# EAGLE board RC_shield (EAGLE 7.1.0)
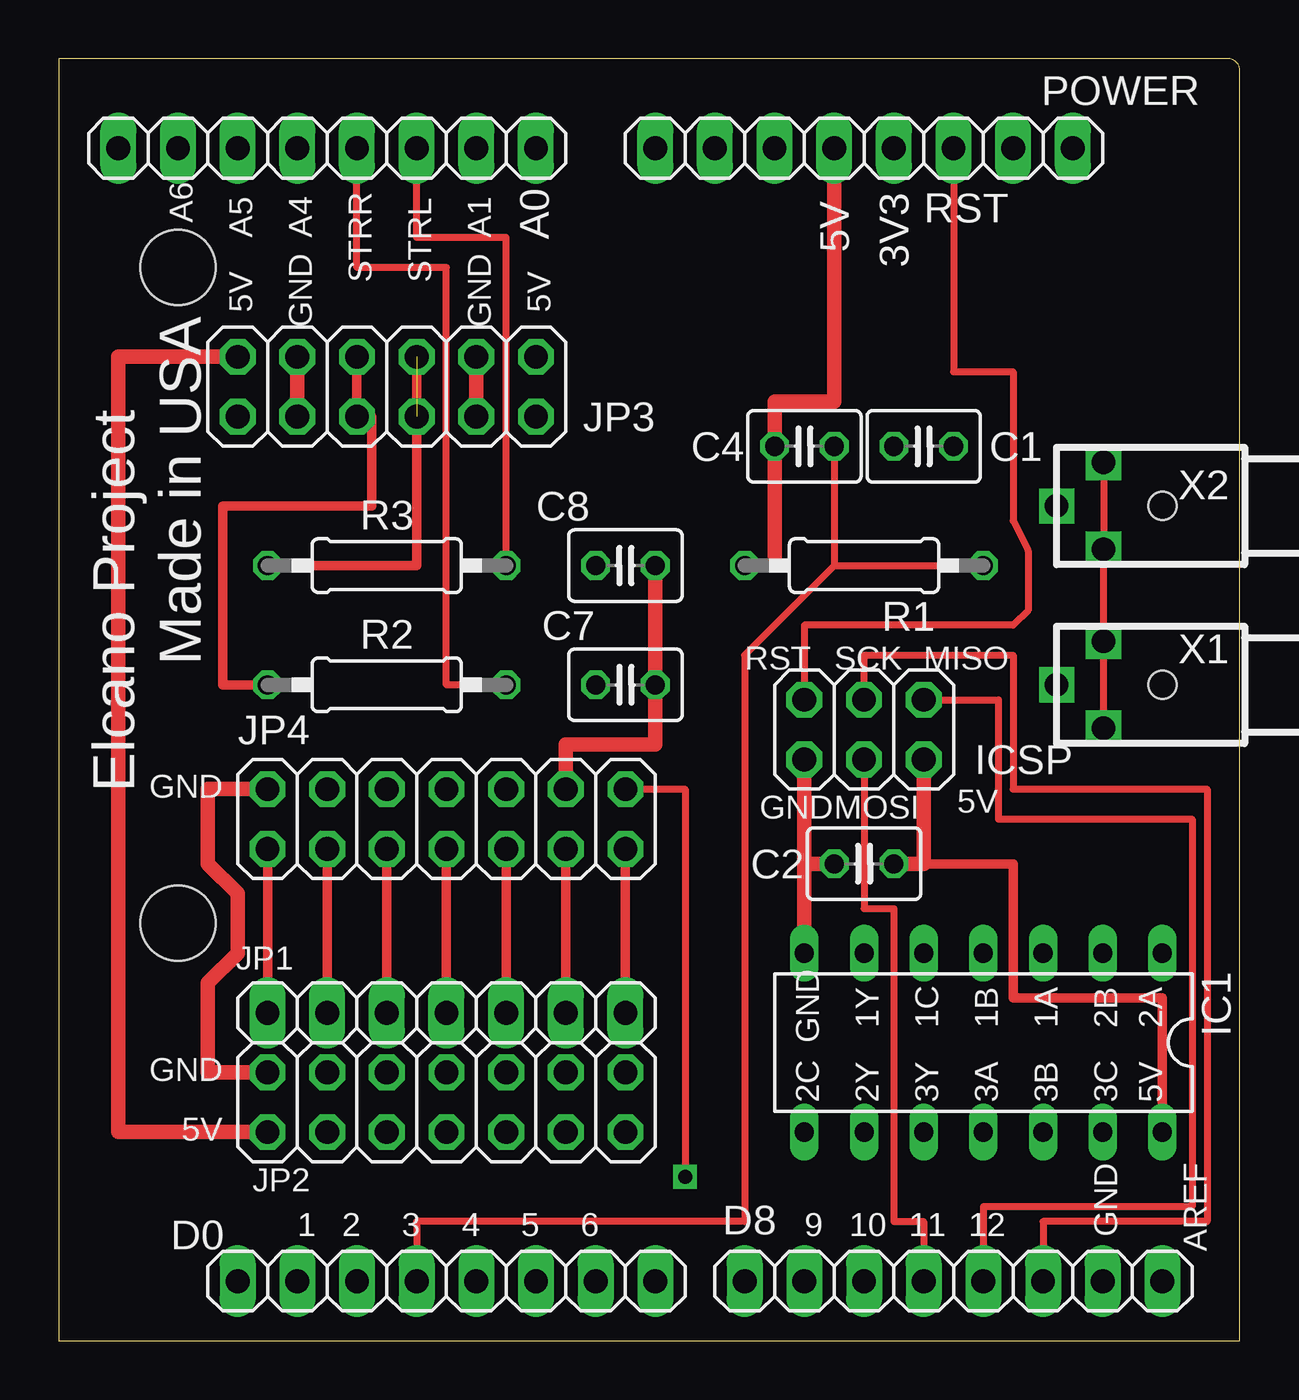
[diagram p0: board, top side]
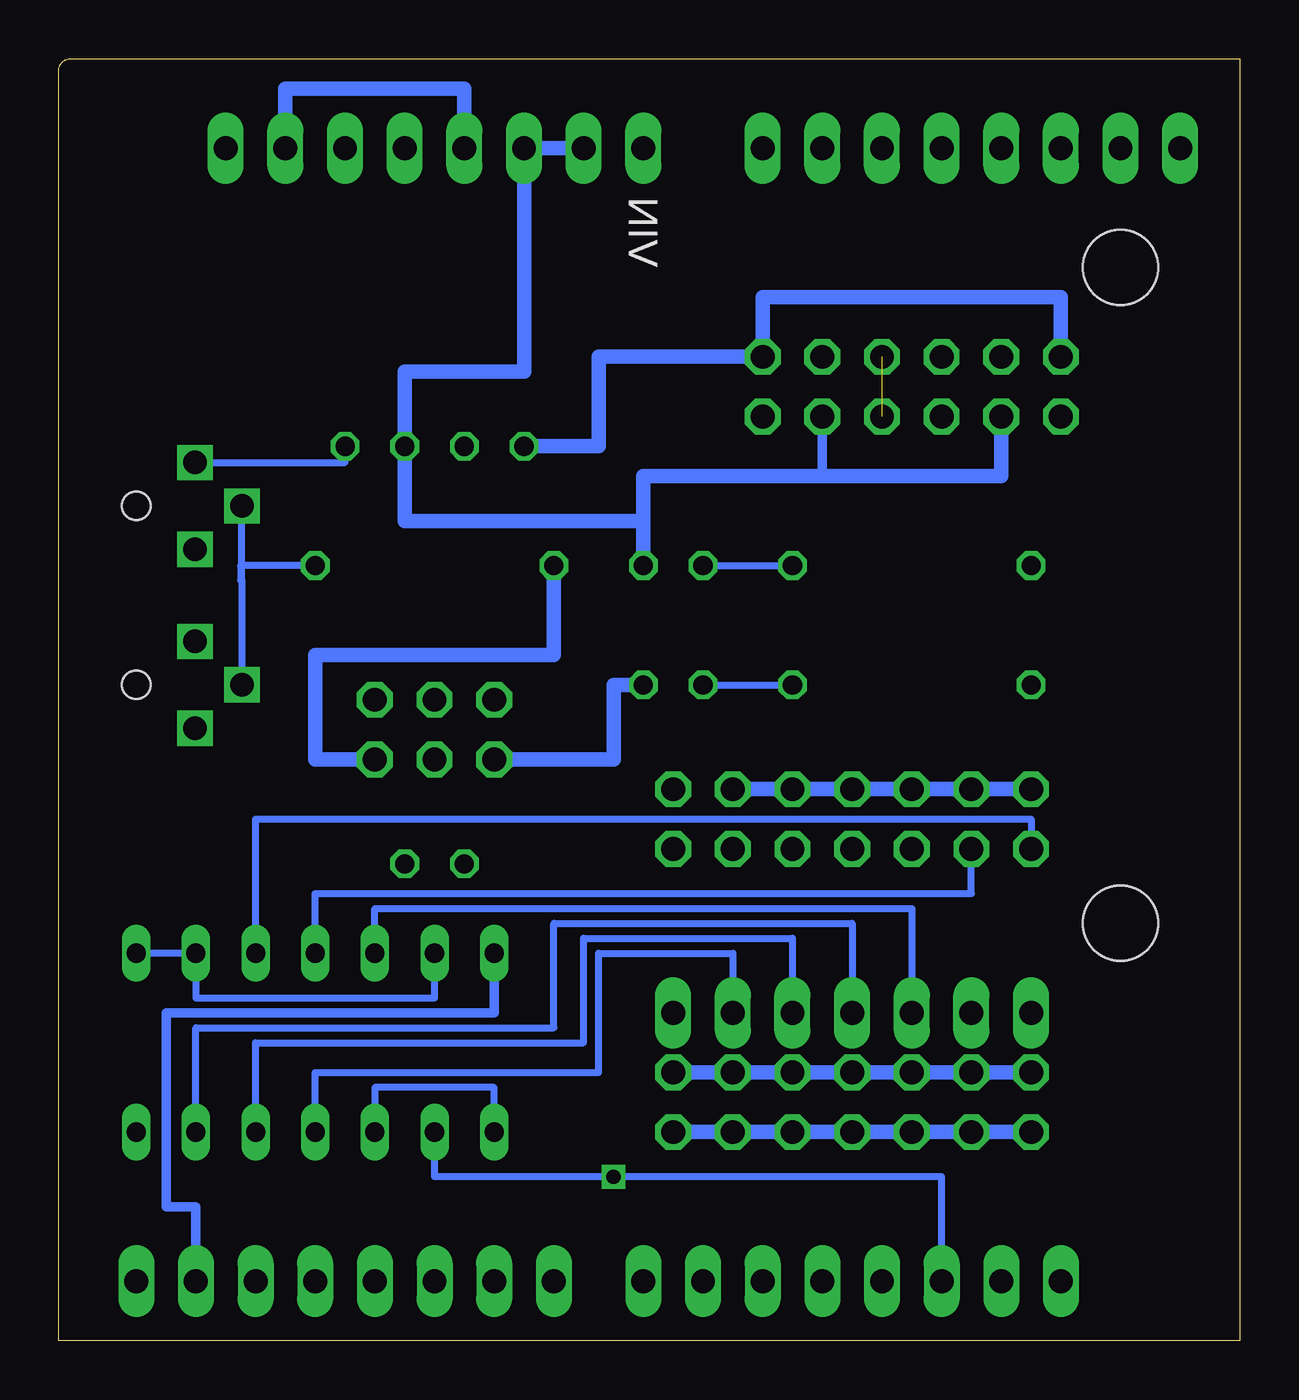
[diagram p1: board, bottom side, seen from below]

Size 50.29 x 54.61 mm. Coordinates in mm from the lower left corner, seen from the top.
Outline: 0,54.6 0,0 50.29,0 50.29,54.1 arc90 49.78,54.61 0,54.6
Copper layers (1*16): Top 0.0178mm / dielectric 59mil / Bottom 0.0178mm
Design rules "SSC-EAGLE-2Lyr_v1.0.0.3": minimum track width 6mil, minimum drill 14mil, track to track 6mil, track to pad 6mil, pad to pad 6mil, via to via 6mil, smd to smd 6mil, copper to edge 20mil, drill to drill 16mil, minimum pad ring 8mil, minimum via ring 8mil, stop-mask expansion 3mil, vias tented up to drill 0mil, thermal gap 10mil
Net classes: 0 default: width 0.152 mm, drill 0.305 mm, clearance 0.152 mm
Holes 3.2 mm at 5.08,17.78 5.08,45.72

## Footprints (pad centres in the part's own frame; a part is rotated, then mirrored left to right if it is on the bottom)
1X08 = drill 1.016 long: 1 -8.89,0; 2 -6.35,0; 3 -3.81,0; 4 -1.27,0; 5 1.27,0; 6 3.81,0; 7 6.35,0; 8 8.89,0
C025-030X050 = drill 0.813 octagon: 1 -1.27,0; 2 1.27,0
DIL14 = drill 0.813 long: 1 -7.62,-3.81; 2 -5.08,-3.81; 3 -2.54,-3.81; 4 0,-3.81; 5 2.54,-3.81; 6 5.08,-3.81; 7 7.62,-3.81; 8 7.62,3.81; 9 5.08,3.81; 10 2.54,3.81; 11 0,3.81; 12 -2.54,3.81; 13 -5.08,3.81; 14 -7.62,3.81
2X03 = drill 1.016 octagon: 1 -2.54,-1.27; 2 -2.54,1.27; 3 0,-1.27; 4 0,1.27; 5 2.54,-1.27; 6 2.54,1.27
1X07 = drill 1.016 long: 1 -7.62,0; 2 -5.08,0; 3 -2.54,0; 4 0,0; 5 2.54,0; 6 5.08,0; 7 7.62,0
2X07 = drill 1.016 octagon: 1 -7.62,-1.27; 2 -7.62,1.27; 3 -5.08,-1.27; 4 -5.08,1.27; 5 -2.54,-1.27; 6 -2.54,1.27; 7 0,-1.27; 8 0,1.27; 9 2.54,-1.27; 10 2.54,1.27; 11 5.08,-1.27; 12 5.08,1.27; 13 7.62,-1.27; 14 7.62,1.27
2X06 = drill 1.016 octagon: 1 -6.35,-1.27; 2 -6.35,1.27; 3 -3.81,-1.27; 4 -3.81,1.27; 5 -1.27,-1.27; 6 -1.27,1.27; 7 1.27,-1.27; 8 1.27,1.27; 9 3.81,-1.27; 10 3.81,1.27; 11 6.35,-1.27; 12 6.35,1.27
0207/10 = drill 0.813 octagon: 1 -5.08,0; 2 5.08,0
ODO_JACK = drill 1 square: P$1 4.5,0; P$2 2.5,1.85; P$3 2.5,-1.85 | hole 1.2: 0,0

## Placement (x,y rotation side)
A0  A7  [1X08]  11.43,50.8 0 top
C1  1 uF  [C025-030X050]  36.83,38.1 0 top
C2  0.1 uF  [C025-030X050]  34.29,20.32 0 top
C4  1 uF  [C025-030X050]  31.75,38.1 0 top
C7  1 uF  [C025-030X050]  24.13,27.94 0 top
C8  1 uF  [C025-030X050]  24.13,33.02 180 top
D0  D7  [1X08]  16.51,2.54 180 top
D8  D13  [1X08]  38.1,2.54 180 top
IC1  744075  [DIL14]  39.37,12.7 180 top
ICSP  1  [2X03]  34.29,26.04 180 top
JP1  RC RECEIVER  [1X07]  16.51,13.97 0 top
JP2  RC PWR  [2X07]  16.51,10.16 0 top
JP3  Turn  [2X06]  13.97,40.64 180 top
JP4  RC Signals  [2X07]  16.51,22.23 0 top
POWER  GND  [1X08]  34.29,50.8 0 top
R1  4.7 K  [0207/10]  34.29,33.02 180 top
R2  4.7 K  [0207/10]  13.97,27.94 0 top
R3  4.7 K  [0207/10]  13.97,33.02 0 top
X1  CLICK  [ODO_JACK]  46.99,27.94 180 top
X2  CLICK  [ODO_JACK]  46.99,35.56 180 top

## Library data of the parts
A0 D0 D8 ICSP JP1-JP4 POWER = pinhead
C1 C2 C4 C7 C8 R1-R3 = rcl
IC1 = ic-package
X1 X2 = Elcano

## Nets
1A: IC1.3 JP1.1 JP4.1
1B: IC1.4 JP1.2 JP4.3
1C: IC1.5 JP1.3 JP4.5
1Y: IC1.1 IC1.2 IC1.6
3A: IC1.11 JP1.6 JP4.11
3B: IC1.12 JP1.5 JP4.9
3C: IC1.13 JP1.4 JP4.7
3Y: IC1.8 IC1.10
+5V: C2.2 C4.1 IC1.14 ICSP.2 JP2.1 JP2.3 JP2.5 JP2.7 JP2.9 JP2.11 JP2.13 JP3.1 JP3.11 POWER.4 POWER.7 R1.2
CLICK2: C4.2 D0.5 R1.1 X1.P$1 X2.P$1
GND: C1.1 C2.1 C7.2 C8.1 D8.2 IC1.7 ICSP.6 JP2.2 JP2.4 JP2.6 JP2.8 JP2.10 JP2.12 JP2.14 JP3.3 JP3.4 JP3.9 JP3.10 JP4.2 JP4.4 JP4.6 JP4.8 JP4.10 JP4.12 POWER.2 POWER.3
MISO: D8.4 ICSP.1
MOSI: D8.5 ICSP.4
N$1: JP3.7 JP3.8 R2.1
N$2: JP3.5 JP3.6 R3.1
N$3: JP1.7 JP4.13
N$23: C1.2 X1.P$2 X1.P$3 X2.P$2 X2.P$3
RC_COMBINED: D0.6 IC1.9 JP4.14
RST: ICSP.5 POWER.6
SCK: D8.3 ICSP.3
STR_L: A0.6 C8.2 R3.2
STR_R: A0.5 C7.1 R2.2

## Tracks (layer width: path | path; a pad name or v marks a point on that pad's centre or on a via)
1A
  Top 0.406: JP4.1 JP1.1
  Bottom 0.305: IC1.3 41.91,22.23 8.89,22.23 JP4.1
1B
  Top 0.406: JP4.3 JP1.2
  Bottom 0.305: IC1.4 39.37,19.05 11.43,19.05 JP4.3
1C
  Top 0.406: JP4.5 JP1.3
  Bottom 0.305: IC1.5 36.83,18.41 13.97,18.41 JP1.3
1Y
  Bottom 0.305: IC1.1 IC1.2 44.45,14.61 34.29,14.61 IC1.6
3A
  Top 0.406: JP4.11 JP1.6
  Bottom 0.305: IC1.11 39.37,11.43 27.3,11.43 27.3,16.51 21.59,16.51 JP1.6
3B
  Top 0.406: JP4.9 JP1.5
  Bottom 0.305: IC1.12 41.91,12.7 27.94,12.7 27.94,17.14 19.05,17.14 JP1.5
3C
  Top 0.406: JP4.7 JP1.4
  Bottom 0.305: IC1.13 44.45,13.34 29.21,13.34 29.21,17.78 16.51,17.78 JP1.4
3Y
  Bottom 0.305: IC1.8 31.75,10.79 36.83,10.79 IC1.10
+5V
  Top 0.305: 30.48,33.02 R1.2
  Top 0.406: IC1.14 46.99,14.61 40.64,14.61 40.64,20.32 36.19,20.32
  Top 0.61: 30.48,33.02 C4.1 30.48,40.01 33.02,40.01 POWER.4 | ICSP.2 36.83,20.32 36.19,20.32 C2.2 | JP2.1 2.54,8.89 2.54,41.91 JP3.11
  Bottom 0.406: JP2.1 JP2.3 JP2.5 JP2.7 JP2.9 JP2.11 JP2.13
  Bottom 0.61: C4.1 27.3,38.1 27.3,41.91 JP3.1 20.32,44.45 7.62,44.45 JP3.11 | POWER.7 40.64,53.34 33.02,53.34 POWER.4 | ICSP.2 39.37,24.77 39.37,29.21 29.21,29.21 R1.2 | JP2.13 JP2.1
CLICK2
  Top 0.305: C4.2 33.02,33.02 | 33.02,33.02 R1.1 | 33.02,33.02 29.21,29.21 29.21,5.08 15.24,5.08 D0.5
  Bottom 0.305: R1.1 42.55,33.02 42.55,32.38 42.49,32.38 | 42.49,32.38 X2.P$1 | 42.49,32.38 X1.P$1
GND
  Top 0.61: JP3.9 JP3.10 | JP3.3 JP3.4 | C8.1 C7.2 25.4,25.4 21.59,25.4 JP4.12 | ICSP.6 31.75,20.32 | 31.75,20.32 IC1.7 | C2.1 31.75,20.32 | JP4.2 6.35,23.5 6.35,20.32 7.62,19.05 7.62,16.51 6.35,15.24 6.35,11.43 JP2.2
  Bottom 0.406: 17.78,36.83 JP3.4 | D8.2 44.45,5.71 45.72,5.71 45.72,13.97 31.75,13.97 IC1.7
  Bottom 0.61: JP2.2 JP2.4 JP2.6 JP2.8 JP2.10 JP2.12 JP2.14 | JP4.2 JP4.4 JP4.6 JP4.8 JP4.10 JP4.12 | JP3.10 10.16,36.83 17.78,36.83 25.4,36.83 C8.1 25.4,34.92 35.56,34.92 C1.1 35.56,41.27 30.48,41.27 POWER.3 POWER.2 | ICSP.6 26.67,24.77 26.67,27.94 C7.2
MISO
  Top 0.305: ICSP.1 40,27.3 40,22.23 48.26,22.23 48.26,5.71 39.37,5.71 D8.4
MOSI
  Top 0.305: ICSP.4 34.29,18.41 35.56,18.41 35.56,5.08 36.83,5.08 D8.5
N$1
  Top 0.406: R2.1 6.98,27.94 6.98,35.56 13.34,35.56 13.34,39.37 JP3.8 JP3.7
N$2  (1 unrouted)
  Top 0.406: R3.1 15.24,33.02 JP3.5
N$3
  Top 0.406: JP4.13 JP1.7
N$23
  Top 0.305: X2.P$3 X2.P$2 X1.P$3 X1.P$2
  Bottom 0.305: X2.P$3 38.1,37.41 C1.2
RC_COMBINED  (via drill 0.6)
  Top 0.305: JP4.14 26.67,23.5 v26.67,6.99
  Bottom 0.305: D0.6 12.7,6.99 v26.67,6.99 34.29,6.99 IC1.9
RST
  Top 0.305: POWER.6 38.1,41.27 40.64,41.27 40.64,34.92 41.28,33.66 41.28,31.11 40.64,30.48 31.75,30.48 ICSP.5
SCK
  Top 0.305: ICSP.3 34.29,29.21 40.64,29.21 40.64,23.5 48.89,23.5 48.89,5.08 41.91,5.08 D8.3
STR_L
  Top 0.305: R3.2 19.05,46.99 15.24,46.99 A0.6
  Bottom 0.305: C8.2 R3.2
STR_R
  Top 0.305: R2.2 16.51,27.94 16.51,45.72 12.7,45.72 A0.5
  Bottom 0.305: C7.1 R2.2

## Text on the board
tPlace: A6 | RST | A5 | A4 | A1 | 5V | 3V3 | STRR | STRL | Made in USA | 5V | 5V | GND | GND | RST | SCK | MISO | GND | Elcano Project | 5V | GND | MOSI | GND | 1Y | 1C | 1B | 1A | 2B | 2A | GND | 5V | 2C | 2Y | 3Y | 3A | 3B | 3C | 5V | 1 | 2 | 3 | 4 | 5 | 6 | 9 | 10 | 11 | 12 | GND | AREF
bPlace: VIN